# Altium PCB CAR4.PcbDoc
Units mil, origin at the board's own origin, x right, y up, seen from the top; angles counter-clockwise.
Board outline 6000 x 4000 mil, 2 copper layers (Top Layer, Bottom Layer); 49 components, 39 nets, 173 pads, 0 vias.
Unrouted connection lines stored in the file: 13.
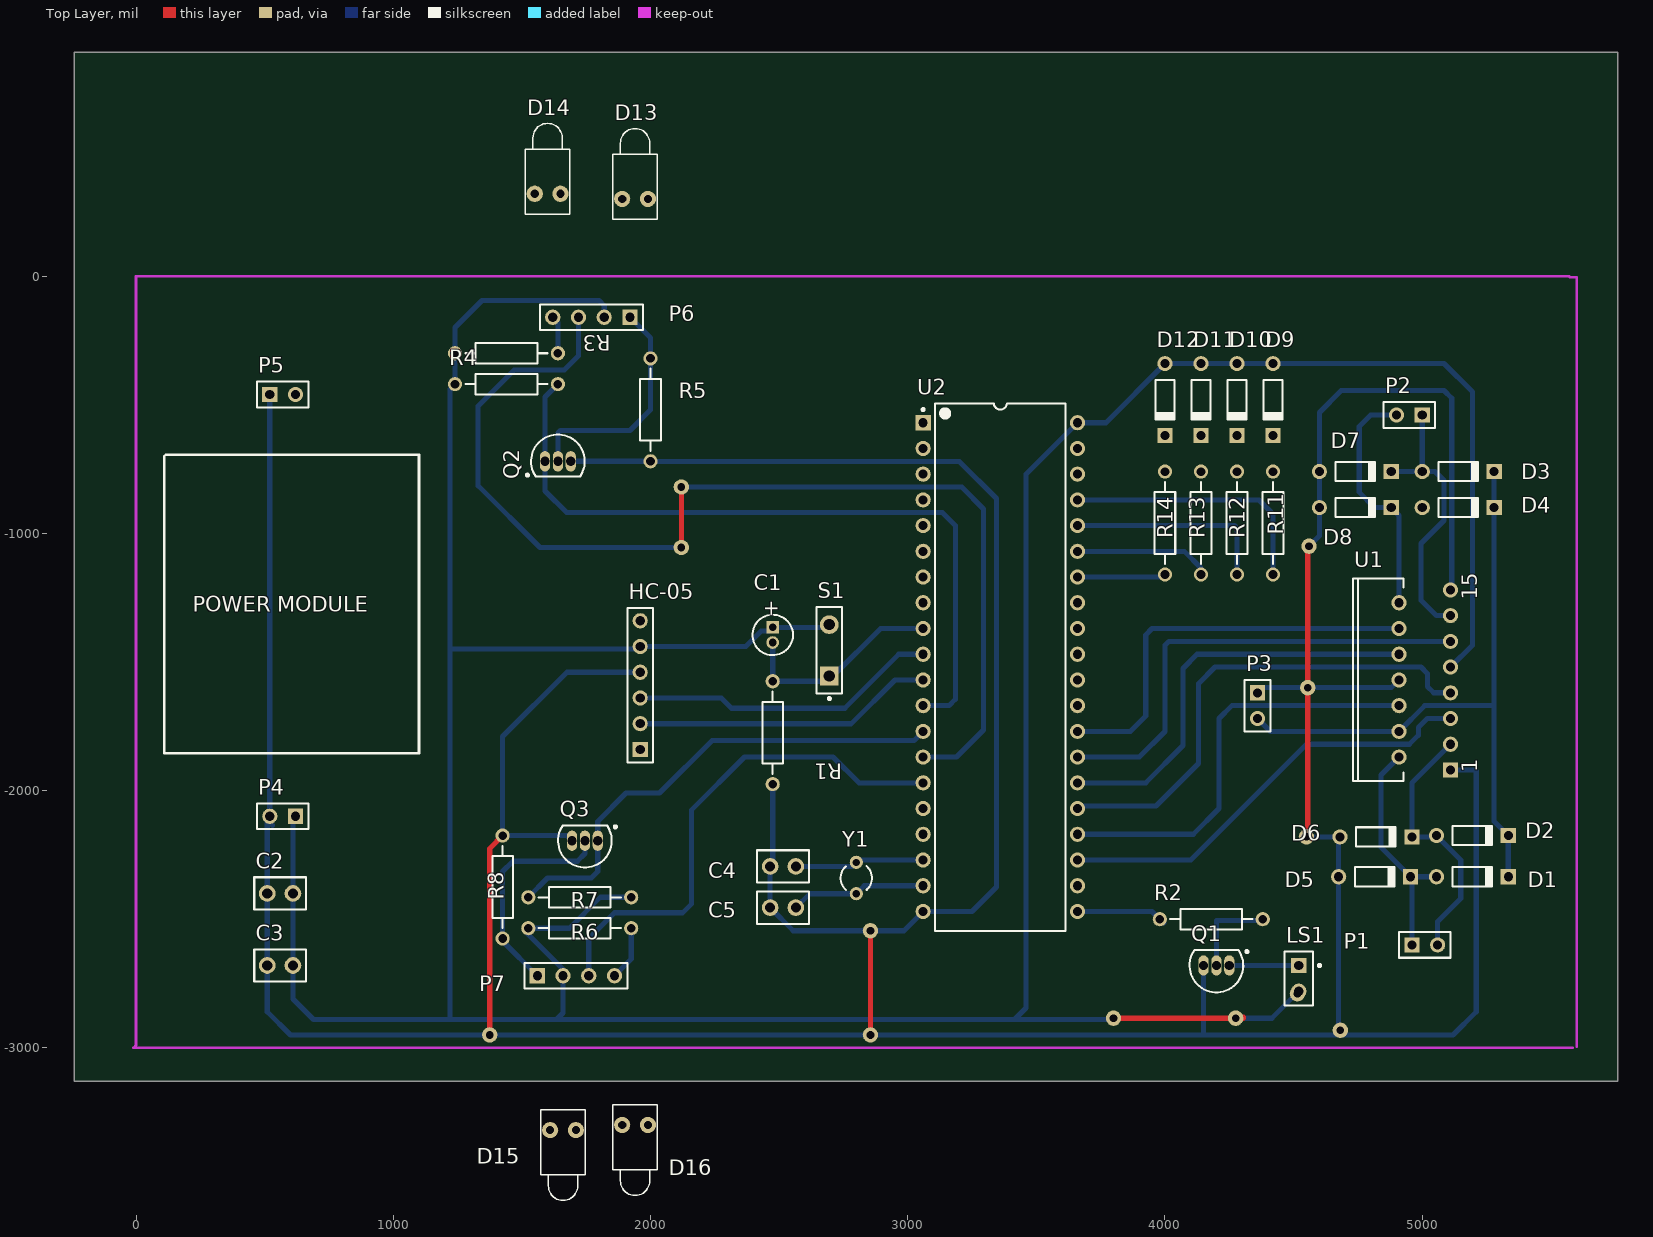
[diagram p0: Top Layer view]
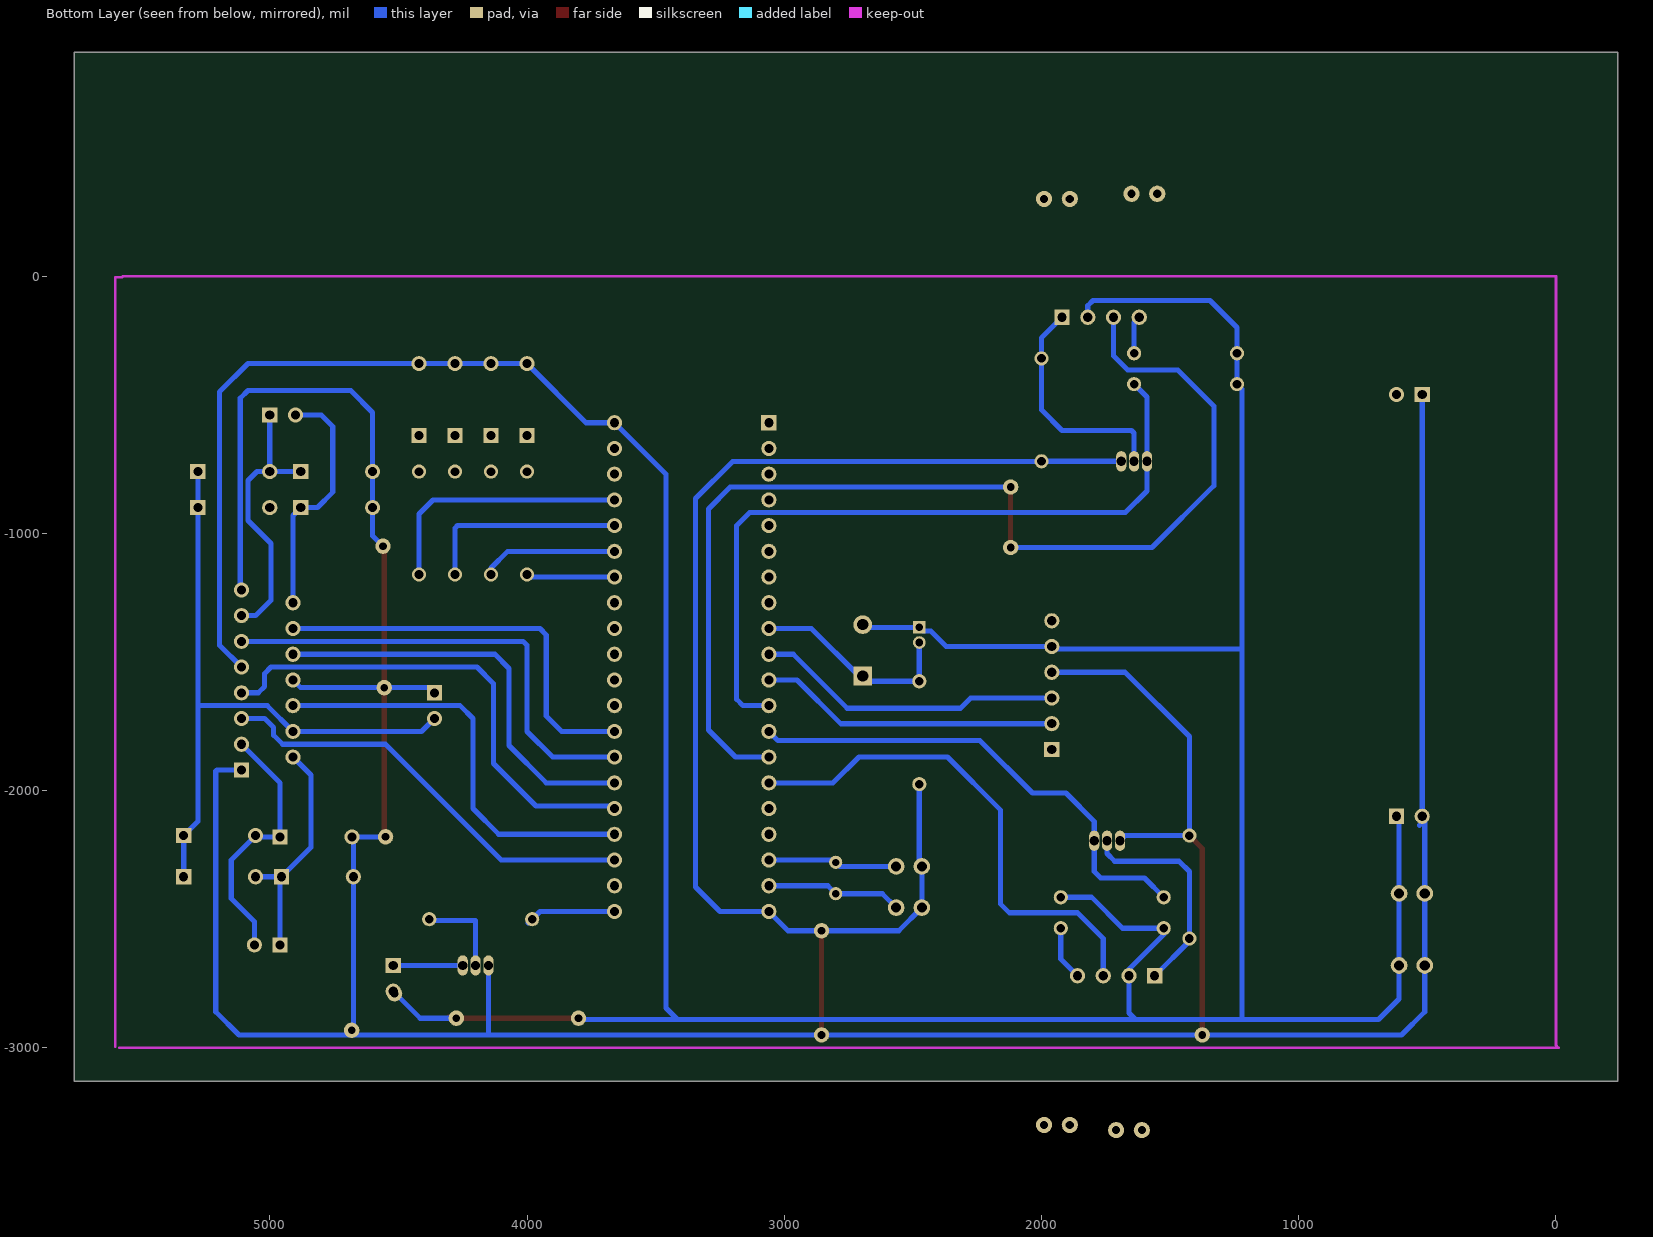
[diagram p1: Bottom Layer view, seen from below]

## Layer stack, top to bottom
Top Layer: signal copper 1.4
Dielectric: dielectric 12.6, FR-4, Dk 4.8
Bottom Layer: signal copper 1.4

## Board outline
-240,-3130 5760,-3130 5760,870 -240,870

## Design rules (kind name [scope] priority, off if disabled: settings)
Clearance [All] p1: gap=10
PolygonConnect [All] p1: connectstyle=Relief reliefconductorwidth=10 reliefentries=4 polygonreliefangle="90 Angle"
RoutingVias [All] p1: holewidth=28 width=50 viastyle="Through Hole" minholewidth=28 minwidth=50 maxholewidth=28 maxwidth=50
SilkscreenOverComponentPads [All] p1: minsilkscreentomaskgap=10
SolderMaskExpansion [All] p1: expansion=4
Width [All] p1: maxlimit=50 minlimit=20 preferedwidth=20
27 further rules are at their usual default settings.

## Components (designator, comment, footprint, x,y, rotation, side; value= is the part's Value field where it differs from the comment)
C1 "Cap Pol1" CAPPR1.5-4x5 2475,-1395 r270 top
C2 "Cap" CAPR2.54-5.1x3.2 560,-2400 r0 top
C3 "Cap" CAPR2.54-5.1x3.2 560,-2680 r0 top
C4 "Cap" CAPR2.54-5.1x3.2 2515,-2295 r0 top
C5 "Cap" CAPR2.54-5.1x3.2 2515,-2455 r0 top
D1 "Diode 1N914" DIO7.1-3.9x1.9 5195,-2335 r0 top
D2 "Diode 1N914" DIO7.1-3.9x1.9 5195,-2175 r0 top
D3 "Diode 1N914" DIO7.1-3.9x1.9 5140,-760 r0 top
D4 "Diode 1N914" DIO7.1-3.9x1.9 5140,-900 r0 top
D5 "Diode 1N914" DIO7.1-3.9x1.9 4815,-2335 r0 top
D6 "Diode 1N914" DIO7.1-3.9x1.9 4820,-2180 r0 top
D7 "Diode 1N914" DIO7.1-3.9x1.9 4740,-760 r0 top
D8 "Diode 1N914" DIO7.1-3.9x1.9 4740,-900 r0 top
D9 "" DIO7.1-3.9x1.9 4420,-480 r270 top
D10 "" DIO7.1-3.9x1.9 4280,-480 r270 top
D11 "" DIO7.1-3.9x1.9 4140,-480 r270 top
D12 "" DIO7.1-3.9x1.9 4000,-480 r270 top
D13 "RED" LED-1 1940,300 r90 top
D14 "" LED-1 1600,320 r90 top
D15 "RED" LED-1 1660,-3320 r270 top
D16 "" LED-1 1940,-3300 r270 top
HC-05 "Header 6" HDR1X6 1960,-1840 r90 top
LS1 "Bell" PIN2 4520,-2680 r270 top
P1 "电机1" HDR1X2 4960,-2600 r0 top
P2 "电机2" HDR1X2 5000,-540 r180 top
P3 "VS12v" HDR1X2 4360,-1620 r270 top
P4 "VCC 5V" HDR1X2 620,-2100 r180 top
P5 "7-12V" HDR1X2 520,-460 r0 top
P6 "Header 4" HDR1X4 1920,-160 r180 top
P7 "Header 4" HDR1X4 1560,-2720 r0 top
Q1 "NPN" BCY-W3 4200,-2680 r90 top
Q2 "NPN" BCY-W3 1640,-720 r270 top
Q3 "NPN" BCY-W3 1745,-2195 r90 top
R1 "Res2" AXIAL-0.4 2475,-1775 r90 top
R2 "10K" AXIAL-0.4 4180,-2500 r180 top
R3 "4.7K" AXIAL-0.4 1440,-300 r180 top
R4 "4.7K" AXIAL-0.4 1440,-420 r180 top
R5 "47K" AXIAL-0.4 2000,-520 r90 top
R6 "4.7K" AXIAL-0.4 1725,-2535 r180 top
R7 "4.7K" AXIAL-0.4 1725,-2415 r0 top
R8 "47K" AXIAL-0.4 1425,-2375 r270 top
R11 "10K" AXIAL-0.4 4420,-960 r270 top
R12 "10K" AXIAL-0.4 4280,-960 r270 top
R13 "10K" AXIAL-0.4 4140,-960 r270 top
R14 "10K" AXIAL-0.4 4000,-960 r270 top
S1 "SW-PB" SPST-2 2695,-1455 r90 top
U1 "L298N" Multiwatt15V 5010,-1570 r90 top
U2 "STC89C52" DIP-40 3360,-1520 r0 top
Y1 "XTAL" BCY-W2/D3.1 2800,-2340 r0 top

## Footprints (in the part's own frame and the unit in brackets; to place one, negate y for a bottom-side part, rotate by r counter-clockwise, add the part's x,y. Pads: shape width x height; smd on the part's side, far side on the other; paste and mask are expansions set on the pad)
AXIAL-0.4 [mm] "Axial Device, Thru-Hole; 2 Leads; 0.4 in Pin Spacing"
  round 1.4 hole 0.85: 1(-5.08,0) 2(5.08,0)
  silkscreen extent -4.06,-1.02 4.06,1.02
BCY-W2/D3.1 [mm] "Crystal, Thru-Hole; 2 Leads; Body 3.1 x 8.2 mm (Dia.xH)"
  round 1.3 hole 0.7: 1(0,1.55) 2(0,-1.55)
  silkscreen extent -1.55,-1.19 1.55,1.17
BCY-W3 [mm] "TO, Flat Index; 3 In-Line, Axial Leads; Body Dia. 4.8mm; Leads 0.55 x 0.51 mm (max)"
  oval 2x1 hole 0.9: 1(0,-1.27) 2(0,0) 3(0,1.27)
  silkscreen extent -2.65,-3.13 1.52,2.65, body extent -2.66,-2.66 1.52,2.66, height 5.33
CAPPR1.5-4x5 [mm] "Capacitor, Electrolytic, Radial; Body 4 x 5 mm (Dia.xH typ); Pin Spacing 1.5 mm (typ)"
  rect 1.25x1.25 hole 0.75: 1(-0.75,0)
  round 1.25 hole 0.75: 2(0.75,0)
  silkscreen extent -2,-2 2,2
CAPR2.54-5.1x3.2 [mm] "Capacitor, Ceramic, Thru-Hole, Dipped Radial; Body 5.1 x 3.2 mm (WxT) Pin Spacing 2.54 mm (typ)"
  round 1.65 hole 1: 1(-1.27,0) 2(1.27,0)
  silkscreen extent -2.55,-1.6 2.55,1.6
DIO7.1-3.9x1.9 [mm] "Diode, Axial; Body 3.8 x 1.9 mm (LxDia. max), Lead Dia. 0.53 mm (max)"
  round 1.5 hole 0.9: 1(-3.55,0)
  rect 1.5x1.5 hole 0.9: 2(3.55,0)
  silkscreen extent -1.95,-0.95 2.05,0.95
DIP-40 [mm] "DIP, 40-Pin, Row Spacing 15.24 mm, Pitch 2.54 mm"
  rect 1.5x1.5 hole 0.9: 1(-7.62,24.13)
  round 1.5 hole 0.9: 2(-7.62,21.59) 3(-7.62,19.05) 4(-7.62,16.51) 5(-7.62,13.97) 6(-7.62,11.43) 7(-7.62,8.89) 8(-7.62,6.35) 9(-7.62,3.81) 10(-7.62,1.27) 11(-7.62,-1.27) 12(-7.62,-3.81) 13(-7.62,-6.35) 14(-7.62,-8.89) 15(-7.62,-11.43) 16(-7.62,-13.97) 17(-7.62,-16.51) 18(-7.62,-19.05) 19(-7.62,-21.59) 20(-7.62,-24.13) 21(7.62,-24.13) 22(7.62,-21.59) 23(7.62,-19.05) 24(7.62,-16.51) 25(7.62,-13.97) 26(7.62,-11.43) 27(7.62,-8.89) 28(7.62,-6.35) 29(7.62,-3.81) 30(7.62,-1.27) 31(7.62,1.27) 32(7.62,3.81) 33(7.62,6.35) 34(7.62,8.89) 35(7.62,11.43) 36(7.62,13.97) 37(7.62,16.51) 38(7.62,19.05) 39(7.62,21.59) 40(7.62,24.13)
  silkscreen extent -7.74,-26.05 6.45,26.05, body extent -7.42,-26.03 7.42,26.03, height 5.08
HDR1X2 [mm] "Connector; Header; 2 Position"
  rect 1.5x1.5 hole 0.9: 1(0,0)
  round 1.5 hole 0.9: 2(2.54,0)
  silkscreen extent -1.27,-1.27 3.81,1.27
HDR1X4 [mm] "Connector; Header; 4 Position"
  rect 1.5x1.5 hole 0.9: 1(0,0)
  round 1.5 hole 0.9: 2(2.54,0) 3(5.08,0) 4(7.62,0)
  silkscreen extent -1.27,-1.27 8.89,1.27
HDR1X6 [mm] "Connector; Header; 6 Position"
  rect 1.5x1.5 hole 0.9: 1(0,0)
  round 1.5 hole 0.9: 2(2.54,0) 3(5.08,0) 4(7.62,0) 5(10.16,0) 6(12.7,0)
  silkscreen extent -1.27,-1.27 13.97,1.27
LED-1 [mm] "Typical RED GaAs LED; 2 Leads"
  round 1.6 hole 0.8: 1(0,1.27) 2(0,-1.27)
  silkscreen extent -2,-2.2 6.95,2.2
Multiwatt15V [mm] "TO, Thru-Hole, Vertical, Heatsink Mounted; 15 Bent Staggered Leads; Pitch 1.27 mm"
  rect 1.5x1.5 hole 0.9: 1(-8.89,-2.54)
  round 1.5 hole 0.9: 2(-7.62,2.54) 3(-6.35,-2.54) 4(-5.08,2.54) 5(-3.81,-2.54) 6(-2.54,2.54) 7(-1.27,-2.54) 8(0,2.54) 9(1.27,-2.54) 10(2.54,2.54) 11(3.81,-2.54) 12(5.08,2.54) 13(6.35,-2.54) 14(7.62,2.54) 15(8.89,-2.54)
  silkscreen extent -10,2.09 10,7.09
PIN2 [mm] "Photosensitive Diode; 2 Leads"
  rect 1.5x1.5 hole 0.9: 1(0,0)
  round 1.5 hole 0.9: 2(2.54,0)
  silkscreen extent -1.4,-1.4 3.94,2.18
SPST-2 [mm] "Circuit Breaker; 2 Leads"
  rect 1.85x1.85 hole 1.1: 1(-2.54,0)
  round 1.85 hole 1.1: 2(2.54,0)
  silkscreen extent -4.89,-1.27 4.28,1.27

## Part data
C1: "Polarized Capacitor (Radial)"
C2 C3 C4 C5: "Capacitor"
D1 D2 D3 D4 D5 D6 D7 D8: "High Conductance Fast Diode"
D9 D10 D11 D12 D14 D16: library part LED0, "Typical INFRARED GaAs LED"
D13 D15: library part LED_RCV
HC-05: "Header, 6-Pin"
LS1: "Electrical Bell"
P1 P2 P3 P4 P5: library part "Header 2", "Header, 2-Pin"
P6 P7: "Header, 4-Pin"
Q1 Q2 Q3: "NPN Bipolar Transistor"
R1: "Resistor"
R2 R3 R4 R5 R6 R7 R8 R11 R12 R13 R14: library part Res2, "Resistor"
S1: "Switch"
U1: "Dual Full Bridge Driver"
Y1: "Crystal Oscillator"

## Free pads (board coordinates)
  round 60 hole 30: 0(2855,-2950) 1(2855,-2545) 3(3800,-2885) 6(4515,-2790) 7(4275,-2885) 8(4555,-1600) 9(4560,-1050) 10(4681.93,-2931.93) 11(4681.93,-2931.93) 12(1375,-2950) 13(2120,-820) 14(2120,-1055) 15(4550,-2180)

## Nets (pads, with @x,y where several pads share a name; then routed paths per layer and width w, separated by ;. In a path a pad name is that pad's centre, name@x,y a point inside that pad or via, vN(x,y) a via of type N, cw(c..) or ccw(c..) an arc to the next point about the centre after c; other vN are vias at no path point)
5: U1.5 U2.23 | length 1695.4
  Bottom Layer w20: U2.23 4100,-2270 4550,-1820 4950,-1820 4985,-1785 4985,-1755 5020,-1720 U1.5
6: U1.6 U2.24 | length 1662.1
  Bottom Layer w20: U2.24 4110,-2170 4210,-2070 4210,-1720 4260,-1670 U1.6
7: U1.7 U2.25 | length 2040.1
  Bottom Layer w20: U2.25 3670,-2060 3860,-2060 ; 3825,-2060 3860,-2060 ; 5055,-1620 U1.7 ; U1.7@5090,-1620 U1.7 ; 3860,-2060 3965,-2060 4130,-1895 4130,-1585 4195,-1520 4560,-1520 4995,-1520 5020,-1545 5020,-1595 5045,-1620 U1.7
10: U1.10 U2.26 | length 1632.8
  Bottom Layer w20: U2.26 3925,-1970 4070,-1825 4070,-1525 4125,-1470 4840,-1470 U1.10
11: U1.11 U2.27 | length 1832.6
  Bottom Layer w20: U2.27 3900,-1870 4000,-1770 4000,-1435 4015,-1420 4445,-1420 U1.11
12: U1.12 U2.28 | length 1600.2
  Bottom Layer w20: U2.28 3865,-1770 3925,-1710 3925,-1395 3950,-1370 4375,-1370 U1.12
BELL: R2.2 U2.21 | length 353.6
  Bottom Layer w20: U2.21 3950,-2470 R2.2 R2.2@3995,-2515
GND: C2.1 C3.1 C4.1 C5.1 D5.1 D6.1 D7.1 D8.1 HC-05.4 P3.1 P4.2 P5.1 pad.0 pad.1 pad.8 pad.9 pad.10 pad.11 pad.12 pad.15 Q1.3 Q2.3 Q3.3 R1.1 R5.1 R8.1 U1.1 U1.8 U1.15 U2.20 | length 20204.3
  Top Layer w20: pad.12 1375,-2225 R8.1 ; pad.1 2855,-2715 2855,-2750 2855,-2790 pad.0 pad.0@2865,-2960 ; pad.15 4555,-2175 pad.8 4555,-1235 4555,-1055 pad.9
  Bottom Layer w20: P5.1 P4.2 ; 530,-2135 520,-2125 P4.2 ; Q2.3 R5.1 2000.47,-720.47 3200.47,-720.47 3345,-865 3345,-2375 3250,-2470 U2.20 2985,-2545 2555,-2545 C5.1 C4.1 2475,-2285 R1.1 ; Q3.3 1675,-2175 R8.1 1425,-1790 1675,-1540 HC-05.4 ; Q1.3 4150,-2945 4145,-2950 ; P3.1 4380,-1600 4880,-1600 U1.8 ; pad.15 D6.1 4675.24,-2185 D5.1 4675.24,-2850 4675.24,-2925.24 pad.11@4700,-2950 ; pad.9 4600.24,-1009.76 D8.1 D7.1 4600.24,-529.76 4685,-445 5085,-445 5115,-475 5115,-1215 U1.15 ; U1.1 5170,-1920 5205,-1920 5210,-1925 5210,-2860 5120,-2950 pad.11@4700,-2950 ; P4.2 510,-2110 C3.1 510,-2860 600,-2950 4145,-2950 ; 4145,-2950 pad.11@4700,-2950
K1: HC-05.3 U2.10 | length 1203.6
  Bottom Layer w20: HC-05.3 2275,-1640 2315,-1680 2755,-1680 2965,-1470 U2.10
LED0: D14.2 P6.3 pad.13 pad.14 U2.14 | length 4378
  Top Layer w20: pad.14 pad.13
  Bottom Layer w20: P6.3 1720,-310 1665,-365 1470,-365 1330,-505 1330,-815 1570,-1055 pad.14@2090,-1055 ; pad.13@2120,-830 2130,-820 3210,-820 3295,-905 3295,-1765 3190,-1870 U2.14
LED0+: D14.1 P6.4 R3.1 | length 148.3
  Bottom Layer w20: P6.4 1640,-180 R3.1
LED1: D16.2 P7.3 U2.15 | length 1992.3
  Bottom Layer w20: P7.3 1760,-2575 1860,-2475 2125,-2475 2160,-2440 2160,-2075 2365,-1870 2710,-1870 2810,-1970 U2.15
LED1+: D16.1 P7.4 R6.1 | length 211.9
  Bottom Layer w20: P7.4 1925,-2655 R6.1
LED3: R11.2 U2.37 | length 1017.8
  Bottom Layer w20: U2.37 4365,-870 4420,-925 R11.2
LED4: R12.2 U2.36 | length 804.1
  Bottom Layer w20: U2.36 4270,-970 4280,-980 R12.2
LED5: R13.2 U2.35 | length 531.9
  Bottom Layer w20: U2.35 4075,-1070 4140,-1135 R13.2
LED6: R14.2 U2.34 | length 344.1
  Bottom Layer w20: U2.34 3990,-1170 R14.2
NetC1_2: C1.2 R1.2 S1.1 U2.9 | length 820.4
  Bottom Layer w20: C1.2 R1.2 2675,-1575 S1.1 2710,-1555 2895,-1370 U2.9
NetC4_2: C4.2 U2.18 Y1.1 | length 556.4
  Bottom Layer w20: C4.2 2783.98,-2295 Y1.1 2808.98,-2270 2900,-2270 ; 2848.98,-2270 2900,-2270 ; U2.18 2900,-2270
NetC5_2: C5.2 U2.19 Y1.2 | length 530.2
  Bottom Layer w20: C5.2 2618.98,-2401.02 Y1.2 2831.02,-2370 U2.19
NetD1_1: D1.1 D5.2 P1.1 U1.2 | length 909.2
  Bottom Layer w20: U1.2 4840,-1940 4840,-2220.24 D5.2 ; P1.1 4960,-2340.24 D5.2 ; D1.1 D5.2
NetD2_1: D2.1 D6.2 P1.2 U1.3 | length 1017.2
  Bottom Layer w20: P1.2 5060,-2510 5150,-2420 5150,-2269.76 5060.24,-2180 D6.2 4959.76,-1970.24 U1.3
NetD3_1: D3.1 D7.2 P2.1 U1.13 | length 1082
  Bottom Layer w20: D7.2 D3.1 ; P2.1 5000,-759.76 D3.1 ; U1.13 5055,-1320 4995,-1260 4995,-1040 5085,-950 5085,-795 5050,-760 D3.1
NetD4_1: D4.1 D8.2 P2.2 U1.14 | length 950.8
  Bottom Layer w20: P2.2 4800,-540 4755,-585 4755,-840 4815,-900 D8.2 4910,-930.24 U1.14
NetD9_2: D9.2 R11.1
NetD10_2: D10.2 R12.1
NetD11_2: D11.2 R13.1
NetD12_2: D12.2 R14.1
NetLS1_1: LS1.1 Q1.1 | length 270
  Bottom Layer w20: Q1.1 LS1.1
NetQ1_2: Q1.2 R2.1 | length 357.1
  Bottom Layer w20: Q1.2 4200,-2505 4375,-2505 R2.1
P31: HC-05.2 U2.11 | length 1170.4
  Bottom Layer w20: HC-05.2 2780,-1740 2950,-1570 U2.11
P32: HC-05.6
RED0: Q2.1 R4.1 U2.12 | length 2932
  Bottom Layer w20: 1590,-570 1590,-605 ; R4.1 1590,-470 1590,-605 ; U2.12 3160,-1670 3185,-1645 3185,-970 3134.53,-919.53 1674.53,-919.53 1590,-835 Q2.1 1590,-605
RED0+: C1.1 C2.2 C3.2 D9.1 D10.1 D11.1 D12.1 D13.1 D15.1 HC-05.5 LS1.2 P4.1 P6.2 P7.2 pad.3 pad.6 pad.7 R3.2 R4.2 R6.2 R7.2 S1.2 U1.9 U2.40 | length 15720.6
  Top Layer w20: pad.3 4305,-2885 4305,-2880
  Bottom Layer w20: P4.1 610,-2110 C3.2 610,-2810 690,-2890 1215,-2890 ; P6.2@1820,-135 P6.2 1820,-115 1800,-95 1345,-95 1240,-200 R3.2 R4.2 1220,-440 1220,-545 1220,-675 1220,-1450 ; R7.2 1805,-2415 1685,-2535 R6.2 1525,-2560 1660,-2695 P7.2 1660,-2865 1635,-2890 ; S1.2 2684.53,-1365.47 C1.1 2460.55,-1379.92 2430.39,-1379.92 2370.32,-1440 HC-05.5 1950,-1450 1220,-1450 ; pad.3@3795,-2890 3415,-2890 ; pad.7 4415,-2885 LS1.2 ; U1.9 5195,-1435 5195,-450 5085.24,-340.24 D9.1 D10.1 D11.1 D12.1 3770.24,-570 U2.40 3460,-770 3460,-2845 3415,-2890 ; 1215,-2890 1635,-2890 ; 1215,-2890 1220,-2885 1220,-1450 ; 1635,-2890 3415,-2890
RED0-: D13.2 P6.1 Q2.2 R5.2 | length 900.4
  Bottom Layer w20: Q2.2 1640,-610 1650,-600 1920,-600 2000,-520 R5.2 2000,-240 P6.1
RED1: Q3.1 R7.1 U2.13 | length 1896.1
  Bottom Layer w20: R7.1 1600,-2340 1770,-2340 1795,-2315 Q3.1 ; Q3.1@1795,-2174.68 1795,-2120 1905,-2010 2035,-2010 2240,-1805 3025,-1805 U2.13
RED1-: D15.2 P7.1 Q3.2 R8.2 | length 859.9
  Bottom Layer w20: P7.1 1425,-2585 R8.2 1425,-2315 1465,-2275 1715,-2275 1745,-2245 Q3.2
VBAT: P5.2
VM: D1.2 D2.2 D3.2 D4.2 P3.2 U1.4 | length 2581.7
  Bottom Layer w20: P3.2 4410,-1770 U1.4 5010,-1670 5274.76,-1670 5279.76,-1665 ; D3.2 D4.2 5279.76,-1665 ; D1.2 D2.2 5279.76,-2120 5279.76,-1665
pads on no net: HC-05.1 U2.1 U2.2 U2.3 U2.4 U2.5 U2.6 U2.7 U2.8 U2.16 U2.17 U2.22 U2.29 U2.30 U2.31 U2.32 U2.33 U2.38 U2.39

## Keep-outs
Keep-Out Layer:
  lines w10: 0,-2850 0,0 5570,0 5575,-5 5600,-5 5600,-2995 ; 0,-2835 0,-2990 -10,-3000 130,-3000 5585,-3000

## Silkscreen, mask and mechanical layers (free items; w line width, h text height)
Top Overlay:
  lines w10: 110,-700 110,-1855 1100,-1855 1100,-695 115,-695
  text "POWER MODULE" at 220,-1305 h60

## Text inside footprints (layer, text, board x,y; h text height)
C1: Top Overlay "+" at 2445.47,-1258.19 h59.06 r270
U1: Top Overlay "1" at 5213.35,-1929.06 h59.06 r90; Top Overlay "15" at 5213.35,-1257.4 h59.06 r90